# Altium PCB PCB2.PcbDoc
Units mil, origin at the board's own origin, x right, y up, seen from the top; angles counter-clockwise.
Board outline 2200.03 x 1270.03 mil, 2 copper layers (Top Layer, Bottom Layer); 15 components, 6 nets, 37 pads, 50 vias.
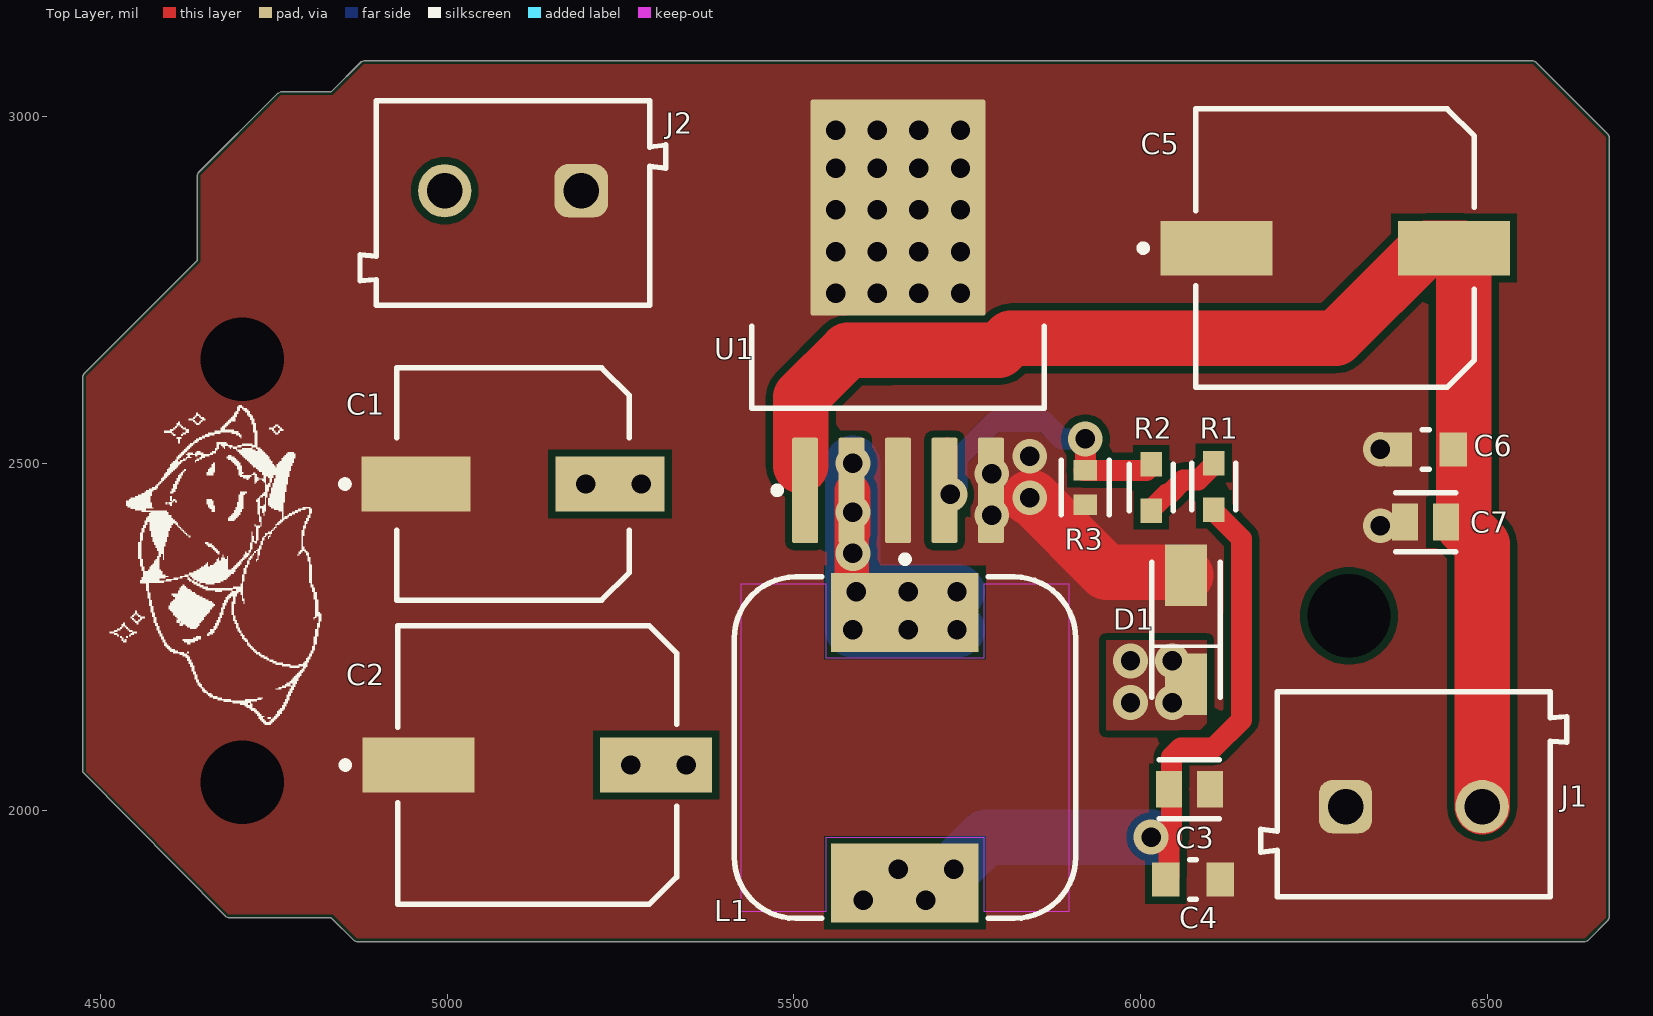
[diagram p0: Top Layer view]
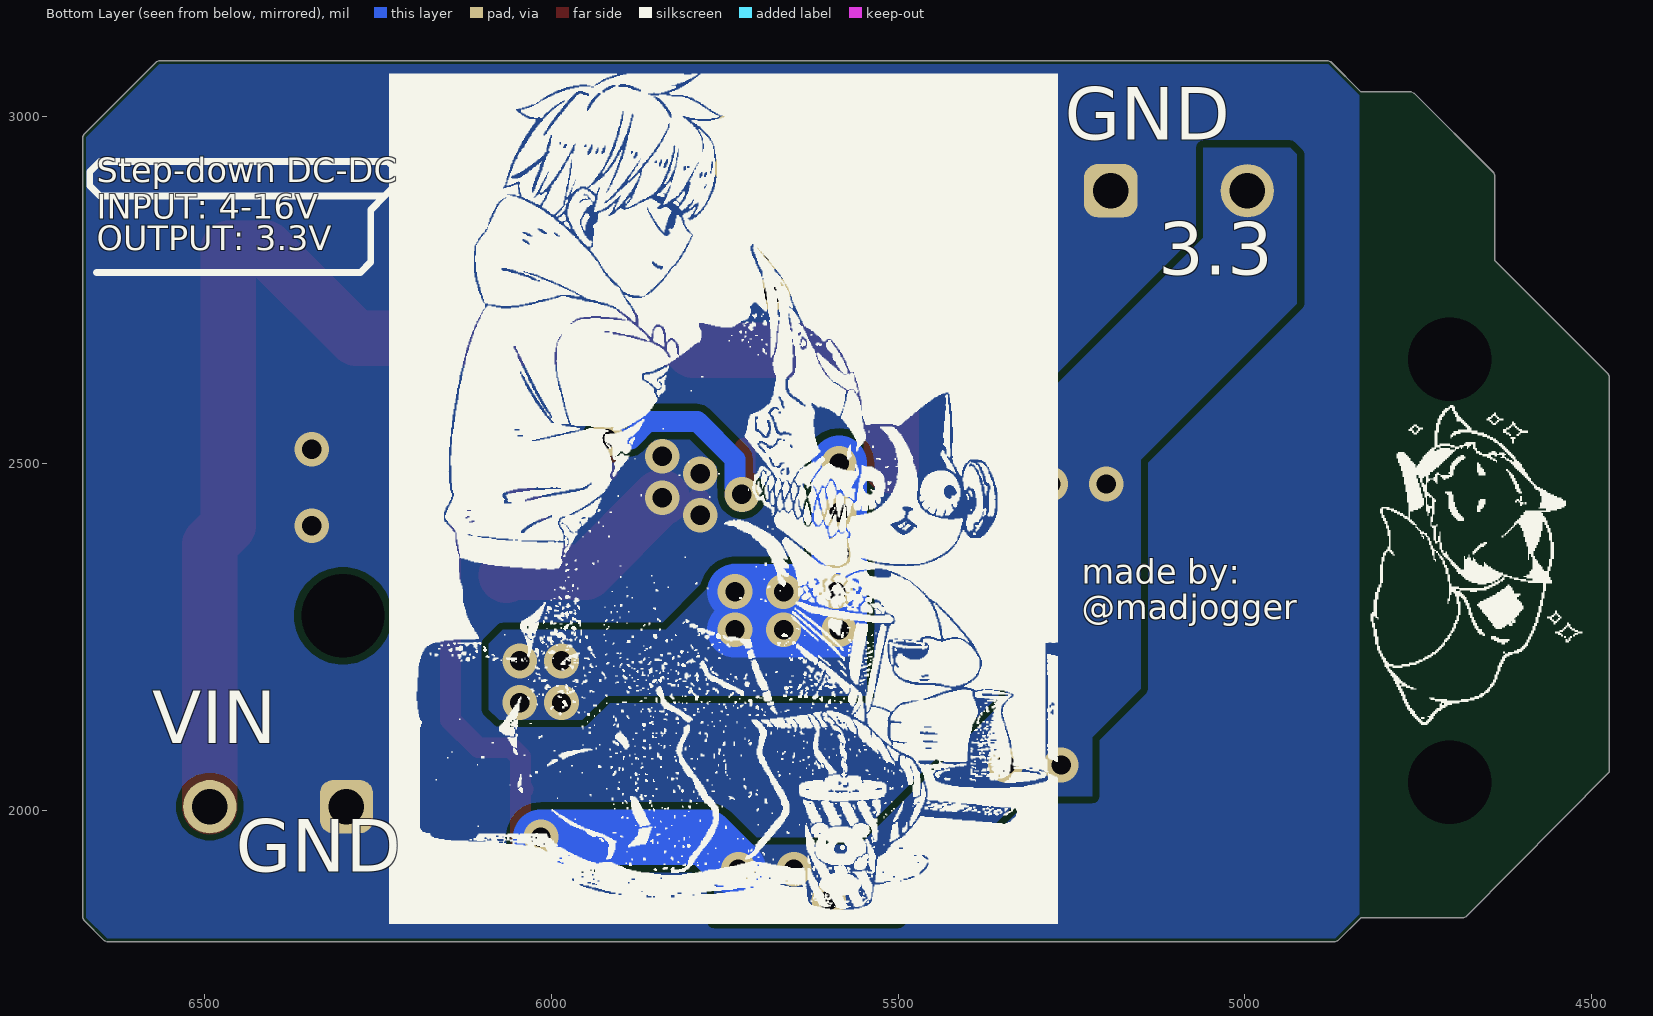
[diagram p1: Bottom Layer view, seen from below]
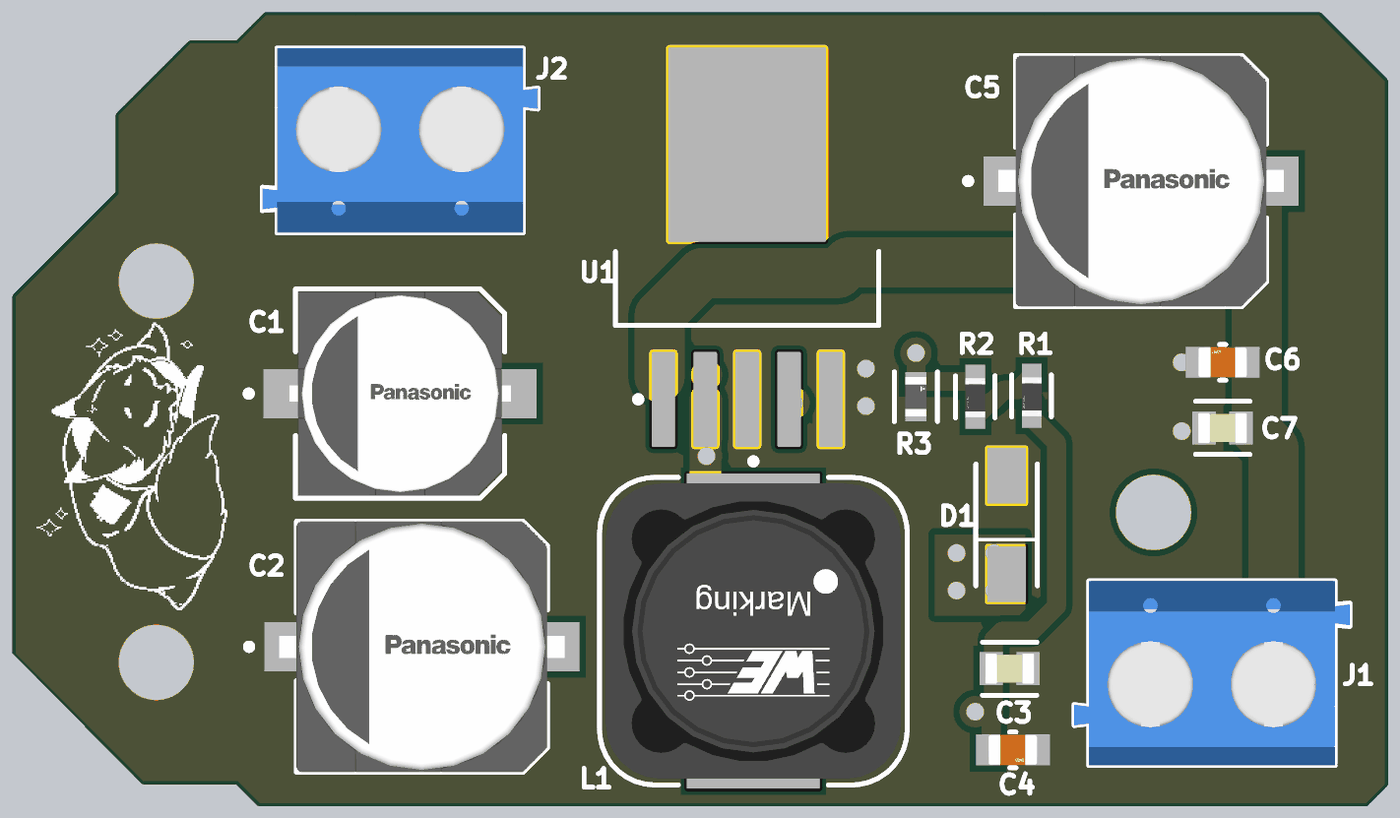
[diagram p2: 3D render of the assembled board from above, using the file's embedded part models]

## Layer stack, top to bottom
Top Solder: solder mask 0.4, Solder Resist, Dk 3.5
Top Layer: signal copper 1.4
Dielectric 1: dielectric 12.6, FR-4, Dk 4.8
Bottom Layer: signal copper 1.4
Bottom Solder: solder mask 0.4, Solder Resist, Dk 3.5

## Board outline
4474.98,2055 4474.98,2625 4476.45,2628.55 4639.98,2792.08 4639.98,2915 4641.45,2918.55 4756.45,3033.55 4760,3035.01 4832.92,3035.01 4876.45,3078.55 4880,3080.01 6565,3080.01 6568.55,3078.55 6673.55,2973.55 6675.02,2970 6675.02,1845 6673.55,1841.45 6643.55,1811.45 6640,1809.98 4870,1809.98 4866.45,1811.45 4832.92,1844.98 4685,1844.98 4681.45,1846.45

## Design rules (kind name [scope] priority, off if disabled: settings)
Clearance [All] p1: gap=10 ignorepadtopadclearanceinfootprint=FALSE
PlaneConnect [All] p1: planeconnectstyle=Direct reliefexpansion=20 reliefentries=4 reliefconductorwidth=10 reliefairgap=10
PolygonConnect [All] p1: connectstyle=Direct reliefconductorwidth=10 reliefentries=4 polygonreliefangle="90 Angle" airgapwidth=10
RoutingVias [All] p1: holewidth=28 width=50 viastyle="Through Hole" minholewidth=28 minwidth=50 maxholewidth=28 maxwidth=50
SolderMaskExpansion [All] p1: expansion=4 istentingtop=FALSE
Width [All] p1: maxlimit=80 minlimit=10 preferedwidth=80
29 further rules are at their usual default settings.

## Components (designator, comment, footprint, x,y, rotation, side; value= is the part's Value field where it differs from the comment)
C1 "EEE-FK0J102P" FP-FKF-MFG 5095,2470 r0 top
C2 "EEE-FC1V221P" FP-FC-G-MFG 5130,2065 r0 top
C3 "C0805C106K8PACTU" FP-C0805C-DG-MFG 6070,2030 r0 top value=10uF
C4 "08055C104JAT2A" FP-0805-L_2_01_0_2-W_1_25-MFG 6075,1900 r0 top
C5 "EEE-FC1V221P" FP-FC-G-MFG 6280,2810 r0 top
C6 "08055C104JAT2A" FP-0805-L_2_01_0_2-W_1_25-MFG 6410.63,2520 r180 top
C7 "C0805C106K8PACTU" FP-C0805C-DG-MFG 6410.47,2415 r180 top value=10uF
D1 "SS54-HF" DIOM5025X220N 6065,2260 r90 top
J1 "691102710002" 691102710002 6393.43,2022.72 r0 top
J2 "691102710002" 691102710002 5095,2875 r180 top (schematic designator J?)
L1 "74477124" WE-PD_1260 5660,2090 r180 top
R1 "RT0603FRE072K7L" FP-RT0603-MFG 6105,2466.54 r270 top value=2.7KΩ
R2 "RT0603FRE072K7L" FP-RT0603-MFG 6015,2465 r270 top value=2.7KΩ
R3 "CRCW06032K00FKEAHP" FP-CRCW0603-HPe3-IPC_C 5920,2465 r90 top
U1 "LM2576SX-3.3/NOPB" KTT0005B_L 5650,2705 r90 top

## Footprints (in the part's own frame and the unit in brackets; to place one, negate y for a bottom-side part, rotate by r counter-clockwise, add the part's x,y. Pads: shape width x height; smd on the part's side, far side on the other; paste and mask are expansions set on the pad)
691102710002 [mm] "5,00mm - modular - blue - Horizontal entry with pressure clamp - 9,9 mm height - 02p"
  rrect50% 1.95x1.95 hole 1.3: 1(-2.5,-0.45)
  round 1.95 hole 1.3: 2(2.5,-0.45)
  silkscreen extent -5.6,-3.75 5.6,3.75, body extent -5.6,-3.75 5.6,3.75, height 9.96
DIOM5025X220N [mm]
  rect 2.25x1.55 smd: 1(-2,0) 2(2,0)
  silkscreen extent -2.47,-1.25 2.47,1.25
FP-0805-L_2_01_0_2-W_1_25-MFG [mm]
  rect 1x1.25 smd paste+0 mask+0: 1(-1,0) 2(1,0)
  silkscreen extent -0.13,-0.72 0.13,0.72, body extent -1.6,-0.82 1.6,0.82, height 0.25
FP-C0805C-DG-MFG [mm]
  rect 0.95x1.35 smd paste+0 mask+0: 1(-0.75,0) 2(0.75,0)
  silkscreen extent -1.11,-1.08 1.1,1.07, body extent -1.4,-0.85 1.4,0.85, height 0.25
FP-CRCW0603-HPe3-IPC_C [mil]
  rect 29.85x33.94 smd paste+0 mask+0: 1(-24.68,0) 2(24.68,0)
  silkscreen extent -40,-34 40,34, body extent -44,-23 44,23, height 10
FP-FC-G-MFG [mm]
  rect 4.1x2 smd paste+0 mask+0: 1(-4.35,0) 2(4.35,0)
  silkscreen extent -7.15,-5.1 5.1,5.1, body extent -6.65,-5.35 6.65,5.35, height 0.25
FP-FKF-MFG [mm]
  rect 4x2 smd paste+0 mask+0: 1(-3.55,0) 2(3.55,0)
  silkscreen extent -6.27,-4.25 4.25,4.25, body extent -5.8,-4.5 5.8,4.5, height 0.25
FP-RT0603-MFG [mm]
  rect 0.9x0.8 smd paste+0 mask+0: 1(-0.85,0) 2(0.85,0)
  silkscreen extent -0.85,-0.81 0.86,0.8, body extent -1.4,-0.55 1.4,0.55, height 0.25
KTT0005B_L [mm] "DPAK, 5-Leads, Body 10.65x9.65mm, Pitch 1.7mm, IPC High Density"
  rrect11% 3.85x0.95 smd: 1(-6.2,3.4) 2(-6.2,1.7) 3(-6.2,0) 4(-6.2,-1.7) 5(-6.2,-3.4)
  rrect2% 7.9x6.4 smd: 6(4.15,0)
  silkscreen extent -6.32,-5.35 -0.2,5.35, body extent -3.2,-5.32 6.45,5.33, height 4.83
WE-PD_1260 [mm] "SMT Shielded Power Inductor, 2-leads, body 12x12mm"
  rect 5.4x2.9 smd: 1(0,-4.95) 2(0,4.95)
  Top Layer keep-out region: -6,6 -2.9,6 -2.9,3.3 2.9,3.3 2.9,6 6,6 6,-6 2.9,-6 2.9,-3.3 -2.9,-3.3 -2.9,-6 -6,-6
  silkscreen extent -6.25,-7.02 6.25,6.25, body extent -6,-6 6,6, height 5.66

## Part data
C1: library part CMP-00287-39480966-1, "EEE-FK0J102P Aluminum Electrolytic Capacitor, 1000 uF, 6.3 V, ± 20%, 2000 hours @ 105°C, Radial Can - SMD", Capacitance=1mF, Case/Package=Radial, ESR (Equivalent Series Resistance)=160mΩ, Leakage Current=3µA, Max Operating Temperature=105°C, Min Operating Temperature=-55°C, Ripple Current=600mA, Tolerance=20%, Voltage=6.3V, Contact Plating=Tin, Diameter=8mm, Dissipation Factor=26%, Height=10.2mm, Height - Seated (Max)=10.2108mm, Impedance=160mΩ, Lead Free="Lead Free", Length=10.2mm, Life (Hours)=2000hours, Lifecycle Status=Production, Mount="PCB, Surface Mount", NexarPartId=39480966, Number of Pins=2, Packaging="Cut Tape", Radiation Hardening=No, REACH SVHC="No SVHC", Ripple Current (AC)=600mA, RoHS=Compliant, Schedule B="8532220020, 8532220020", Termination=SMD/SMT, Voltage Rating=6.3V, Voltage Rating (DC)=6.3V, Width=10mm
C2 C5: library part CMP-05427-002152-1, "CAP ALUM 220UF 20% 35V SMD", Capacitance=220uF, Case/Package=Radial, ESR (Equivalent Series Resistance)=150mR, Leakage Current=3uA, Max Operating Temperature=105°C, Min Operating Temperature=-40°C, Package Quantity=500, Ratings=AEC-Q200, Ripple Current=670mA, Tolerance=20%, Voltage=35V, Construction=Cylindrical, Contact Plating=Tin, Diameter=10mm, Height=10.2mm, Height - Seated (Max)=0.402inch, Impedance=150mR, Lead Free="Lead Free", Length=10.5mm, Life (Hours)=1000Hour, Material=Aluminium, Mount="Surface Mount", Packaging="Tape and Reel", Radiation Hardening=No, Reach SVHC Compliant=Yes, Ripple Current (AC)=670mA, RoHS Compliant=Yes, Series=FC, Termination=SMD/SMT, Voltage Rating=35V, Voltage Rating (DC)=35V, Width=900um
C3 C7: library part CMP-2007-03243-2, "CAP CER 10UF 10V X5R 0805", 3DS Part Number=220-00001, Capacitance=10uF, Manufacturer=Kemet, Package=C0805C-DG, Temperature="-55°C to +85°C", Temperature Characteristic=X5R, Temperature Coefficient=15%, Temperature Range High=+85°C, Temperature Range Low=-55°C, Tolerance=10%, Voltage=10V, Automotive=No, Category=Cap, ComponentLink2Description=Datasheet, ComponentLink2URL=https://content.kemet.com/datasheets/KEM_C1006_X5R_SMD.pdf, Device Class L1="Passive Components", Device Class L2=Capacitors, Device Class L3="Ceramic Capacitors", Digikey Description="CAP CER 10UF 10V X5R 0805", Height=1.4mm, Ipc Land Pattern Name=CAPC200125X125, Lead Free=Yes, Manufacturer Part Number=C0805C106K8PACTU, Material=Ceramic, Mouser Description="CAP CER 10UF 10V X5R 0805", Octopart=https://octopart.com/c0805c106k8pactu-kemet-98697, RoHS=TRUE, Voltage Rating=10V
C4 C6: library part CMP-2000-05808-2, "General Purpose Ceramic Capacitor, 0805, 100nF, 5%, X7R, 0.15, 50V", Capacitance=100nF, Case Code (Imperial)=0805, Case Code (Metric)=2012, Dielectric=X7R, Dielectric Material=Ceramic, Insulation Resistance=100GR, Max Operating Temperature=125°C, Min Operating Temperature=-55°C, Package Quantity=1, Tolerance=5%, Voltage=50V, Case/Package=0805, Contact Plating=Tin, Depth=1.25mm, Dissipation Factor=2.5%, Height=0.94mm, Lead Free="Lead Free", Length=2.01mm, Mount="Surface Mount", Number of Pins=2, Packaging="Tape and Reel", Radiation Hardening=No, REACH SVHC="No SVHC", RoHS Compliant=Yes, Termination=SMD/SMT, Thickness=0.037inch, Voltage Rating=50V, Voltage Rating (DC)=50V, Width=0.049inch
D1: "Diode Schottky 40 V 5A Surface Mount DO-214AC (SMA)", Package="DO-214AC-214 Comchip Technology", Availability="In Stock", Check_prices=https://www.snapeda.com/parts/SS54-HF/Comchip+Technology/view-part/?ref=eda, MF="Comchip Technology", MP=SS54-HF, Price=None, Purchase-URL=https://pricing.snapeda.com/search/part/SS54-HF/?ref=eda, SnapEDA_Link=https://www.snapeda.com/parts/SS54-HF/Comchip+Technology/view-part/?ref=snap
J1 J2: library part CMP-1502-03258-2, Color=Blue, Current=15A, Max Operating Temperature=105°C, Min Operating Temperature=-40°C, Voltage=300V, Contact Material=Brass, Contact Plating=Tin, Current Rating=15A, Height=13.4mm, Housing Material=Nylon, Lead Pitch=5mm, Length=7.5mm, Mount="Through Hole", NexarPartId=8917706, Number Of Contacts=2, Number of Levels=1, Number of Pins=2, Number of Positions Per Level=2, Packaging=Box, Pitch=5.0038mm, Plating=Steel, REACH SVHC=Unknown, RoHS=Compliant, Stripping Length=-6mm, Termination=Screw, Voltage Rating=300V, Width=11.2mm, Wire Gauge (Max)=22AWG, Wire Gauge (Min)=14AWG, Wire/Cable Gauge=22AWG
L1: library part CMP-0227-00690-2, Ambient Temperature Range High=85°C, Ambient Temperature Range Low=-40°C, Case/Package=Nonstandard, Current Rating=700mA, DC Resistance (DCR)=590mΩ, Inductance=470µH, Inductance Tolerance=20%, Max DC Current=640mA, Max Operating Temperature=125°C, Resistance=770mΩ, Saturation Current=800mA, Self Resonant Frequency=2.6MHz, Test Frequency=1kHz, Composition=Wirewound, Core Material=Ferrite, Depth=12mm, Height=6mm, Height - Seated (Max)=5.9944mm, Length=12mm, Min Operating Temperature=-40°C, Mount="Surface Mount", NexarPartId=8917138, Number of Pins=2, Packaging="Tape & Reel (TR)", REACH SVHC=Unknown, RMS Current (Irms)=640mA, RoHS=Compliant, Series Resistance=770mΩ, Shielding=Shielded, Termination=SMD/SMT, Tolerance=20%, Weight=4.535924g, Width=12mm
R1 R2: library part CMP-03412-029269-1, "RES SMD 2.7K OHM 1% 1/10W 0603", Manufacturer=Yageo, Package=RT0603, Power Rating=0.1W, Resistance=2.7KΩ, Temperature="-55°C to +155°C", Temperature Coefficient="50 ppm/°C", Temperature Range High=+155°C, Temperature Range Low=-55°C, Tolerance=0.01, Voltage Rating=75V, Automotive=No, Category=Res, ComponentLink2Description=Datasheet, ComponentLink2URL=http://www.yageo.com/documents/recent/PYu-RT_1-to-0.01_RoHS_L_9.pdf, Composition="Thin Film", Device Class L1="Passive Components", Device Class L2=Resistors, Device Class L3="Chip SMD Resistors", Digikey Description="RES SMD 2.7K OHM 1% 1/10W 0603", Footprint Url=http://www.yageo.com/exep/pages/download/literatures/PYu-R_Mount_10.pdf, Height=0.55mm, Ipc Land Pattern Name=RESC16080X45, Lead Free=Yes, Manufacturer Part Number=RT0603FRE072K7L, Mouser Description="Thin Film Resistors - SMD 1/10W 2.7K ohm 1% 50ppm", Octopart=https://octopart.com/rt0603fre072k7l-yageo-39866772, RoHS=TRUE, Series=RT
R3: library part CMP-2000-03160-2, "RES Thick Film, 2kΩ, 1%, 0.33W, 100ppm/°C, 0603", Case Code (Imperial)=0603, Case Code (Metric)=1608, Max Operating Temperature=155°C, Max Power Dissipation=250mW, Min Operating Temperature=-55°C, Package Quantity=10, Resistance=2kR, Temperature Coefficient=100ppm/°C, Tolerance=1%, Voltage Rating=75V, Case/Package=0603, Composition="Thick Film", Contact Plating=Tin, Depth=0.85mm, Features="Automotive AEC-Q200", Height=0.45mm, Lead Free="Lead Free", Length=1.6mm, Military Standard=Not, Mount="Surface Mount", Number of Terminations=2, Packaging="Tape and Reel", Power Rating=250mW, Radiation Hardening=No, Termination=Solder, Weight=7.1E-05oz, Width=0.033inch
U1: library part CMP-0069-00110-3, "SIMPLE SWITCHER® 3A Step-Down Voltage Regulator, 5-pin TO-263, Pb-Free", Manufacturer="Texas Instruments", PackageTopMarking="NSUZXYTTE#*LM2576S*-3.3 P+", PowerWise=N, Code_JEDEC=MO-169-AB, ComponentLink1Description="Datasheet URL", ComponentLink1URL=http://www.ti.com/general/docs/lit/getliterature.tsp?genericPartNumber=LM2576&fileType=pdf, CompType=Switcher, PackageDescription="TO-263, Molded, .400 x .390 x .180in, 5 Lead, .067in Pitch, Surface Mount", PackageReference=KTT0005B, PinCount=5, RoHS=Y

## Free pads (board coordinates)
  round 60 hole 120: 2(4705,2040) 2(4705,2650) 2(6300,2280)

## Via types
v1: diameter 50, hole 28, Top Layer to Bottom Layer, tented both sides, 50 vias

## Nets (pads, with @x,y where several pads share a name; then routed paths per layer and width w, separated by ;. In a path a pad name is that pad's centre, name@x,y a point inside that pad or via, vN(x,y) a via of type N, cw(c..) or ccw(c..) an arc to the next point about the centre after c; other vN are vias at no path point)
+12: C5.2 C6.1 C7.1 J1.2 U1.1 | length 1958.1
  Top Layer w80: U1.1@5510,2496.69 5510,2595 5577.87,2662.87 5795.22,2662.87 5812.34,2680 6281.18,2680 6411.18,2810 C5.2 6464.37,2810 6465,2809.37 6465,2410 6491.85,2383.15 J1.2
GND: C1.1 C2.1 C3.2 C4.2 C5.1 C6.2 C7.2 D1.2 J1.1 J2.1 pad.2@4705,2040 pad.2@4705,2650 R3.1 U1.3 U1.5 U1.6 | length 297.1
  Top Layer w30: v1(5785,2425) 5785,2447.44 U1.5@5787.56,2450
  Top Layer w80: v1(5840,2450) 5843.15,2450 5950.12,2343.03 6060.71,2343.03 D1.2
  other v1: 6345,2410 5785,2485 5840,2510 6345,2520 5560,2745 5620,2745 5680,2745 5740,2745 5560,2805 5620,2805 5680,2805 5740,2805 5560,2865 5620,2865 5680,2865 5740,2865 5560,2925 5620,2925 5680,2925 5740,2925 5560,2980 5620,2980 5680,2980 5740,2980
NetD1_1: D1.1 L1.1 U1.2 | length 901.2
  Top Layer w50: U1.2@5585,2400 v1(5585,2429.49) 5585,2458.98 U1.2 5583.07,2316.97 5615.16,2284.88 L1.1
  Top Layer w80: L1.1 5709.21,2284.88 L1.1@5724.17,2269.92
  Bottom Layer w80: v1(5585,2500) v1(5585,2429.49) v1(5585,2370) v1(5585,2260) v1(5665,2260) v1(5735,2260) ; v1(5590,2315) v1(5665,2315) v1(5735,2315)
  other v1: 5985,2155 6045,2155 5985,2215 6045,2215
NetR1_1: R1.1 R2.2 | length 120.7
  Top Layer w30: R2.2 6015,2433.5 6037.24,2455.75 6041.1,2455.75 6061.14,2475.79 6082.76,2475.79 6105,2498.03 R1.1
NetR2_1: R2.1 R3.2 U1.4 | length 482
  Top Layer w30: U1.4 5720.63,2464.61 U1.4@5720.63,2521.69 ; R3.2@5918.1,2489.68 6008.19,2489.68 6015,2496.5 R2.1 ; R3.2 v1(5920,2535)
  Bottom Layer w30: v1(5725,2455) 5735,2465 5735,2505.71 5789.29,2560 5860.71,2560 5885.71,2535 v1(5920,2535)
VCC: C1.2 C2.2 C3.1 C4.1 J2.2 L1.2 R1.2 | length 929.6
  Top Layer w30: C4.1 6040.31,1904.69 6040.31,1955.32 6044.17,1959.17 6044.17,2026.3 C3.1 6044.17,2033.7 6044.17,2076.6 6057.57,2090 6105,2090 6145,2130 6145,2391.1 6105,2431.1 R1.2
  Bottom Layer w80: v1(5730,1915) 5776.17,1961.17 v1(6014.7,1961.17)
  other v1: 5600,1870 5690,1870 5650,1915 5265,2065 5345,2065 5200,2470 5280,2470

## Polygon pours and split planes (outlines as drawn)
GND on Bottom Layer "GND_L02_P011" (solid, pour order 11): 4835,3030 4880,3075 6565,3075 6670,2970 6670,1845 6640,1815 4870,1815 4835,1850
VCC on Bottom Layer "VCC_L02_P010" (solid, pour order 10): 4925,2945 4935,2955 5060,2955 5060,2825 5345,2540 5345,2505 5150,2505 4925,2730 4925,2935
VCC on Bottom Layer "VCC_L02_P001" (solid, pour order 1): 5555,1840 5500,1840 5320,2020 5220,2020 5220,2105 5150,2175 5150,2520 5160,2530 5320,2530 5345,2505 5345,2160 5555,1950
NetD1_1 on Bottom Layer "NETD1_1_L02_P007" (solid, pour order 7): 5550,2345 5545,2340 5545,2165 5920,2165 5955,2130 6075,2130 6090,2145 6090,2240 6070,2260 5835,2260 5740,2355 5700,2355
VCC on Bottom Layer "VCC_L02_P000" (solid, pour order 0): 5555,1840 5555,1950 5765,1950 5765,1840
GND on Top Layer "GND_L01_P013" (solid, pour order 13): 5760,2505 5755,2500 5755,2400 5880,2275 6110,2275 6120,2285 6119.51,2285.49 6119.51,2380.54 6094.7,2405.35 6093.16,2403.82 5989.25,2403.82 5989.25,2459.25 5918.29,2459.25 5912.54,2465 5895,2465 5895,2482.54 5875,2502.54 5875,2510
GND on Top Layer "GND_L01_P012" (solid, pour order 12): 4835,3030 4760,3030 4645,2915 4645,2790 4480,2625 4480,2055 4685,1850 4835,1850
GND on Top Layer "GND_L01_P009" (solid, remove dead copper, pour order 9): 6565,3075 6670,2970 6670,1845 6640,1815 4870,1815 4835,1850 4835,3030 4880,3075 4885,3075
NetD1_1 on Top Layer "NETD1_1_L01_P006" (solid, pour order 6): 5950,2245 6095,2245 6095,2125 6085,2115 5950,2115
GND on Top Layer "GND_L01_P005" (solid, pour order 5): 5630,2600 5645,2615 5850,2615 5850,2545 5870,2525 5855,2510 5765,2510 5765,2535 5750,2550 5685,2550 5685,2385 5630,2385
GND on Top Layer "GND_L01_P004" (solid, pour order 4): 5525,3025 6165,3025 6195,2995 6195,2735 5795,2735 5775,2715 5525,2715
GND on Top Layer "GND_L01_P003" (solid, pour order 3): 6400,2555 6400,2365 6325,2365 6315,2375 6315,2555
GND on Top Layer "GND_L01_P002" (solid, pour order 2): 5870,2525 5870,2390 5765,2390 5765,2525

## Silkscreen, mask and mechanical layers (free items; w line width, h text height)
Top Overlay:
  drawing of 68 lines, arcs and shapes, not listed
Bottom Overlay:
  drawing of 1164 lines, arcs and shapes, not listed
  text "GND" at 5259.88,2940.96 h130
  text "Step-down DC-DC" at 6654.94,2893.55 h60
  text "INPUT: 4-16V" at 6654.94,2840.44 h60
  text "OUTPUT: 3.3V" at 6654.94,2795.39 h60
  text "3.3" at 5125,2746.08 h130
  text "made by:" at 5234.94,2314.49 h60
  text "@madjogger" at 5234.94,2263.49 h60
  text "VIN" at 6575,2070.96 h130
  text "GND" at 6454.88,1885.96 h130
Mechanical 1:
  lines w10: 4835,1850 4765,1850 4685,1850 4480,2055 4480,2625 4645,2790 4645,2915 4760,3030 4835,3030 ; 4835,1850 4870,1815 6640,1815 6670,1845 6670,2970 6565,3075 4880,3075 4835,3030 ; 4835,1850 4835,3030